# Altium PCB BSPD_SMD.PcbDoc
Units mil, origin at the board's own origin, x right, y up, seen from the top; angles counter-clockwise.
Board outline 1915 x 1430 mil, 2 copper layers (Top Layer, Bottom Layer); 23 components, 23 nets, 115 pads, 20 vias.
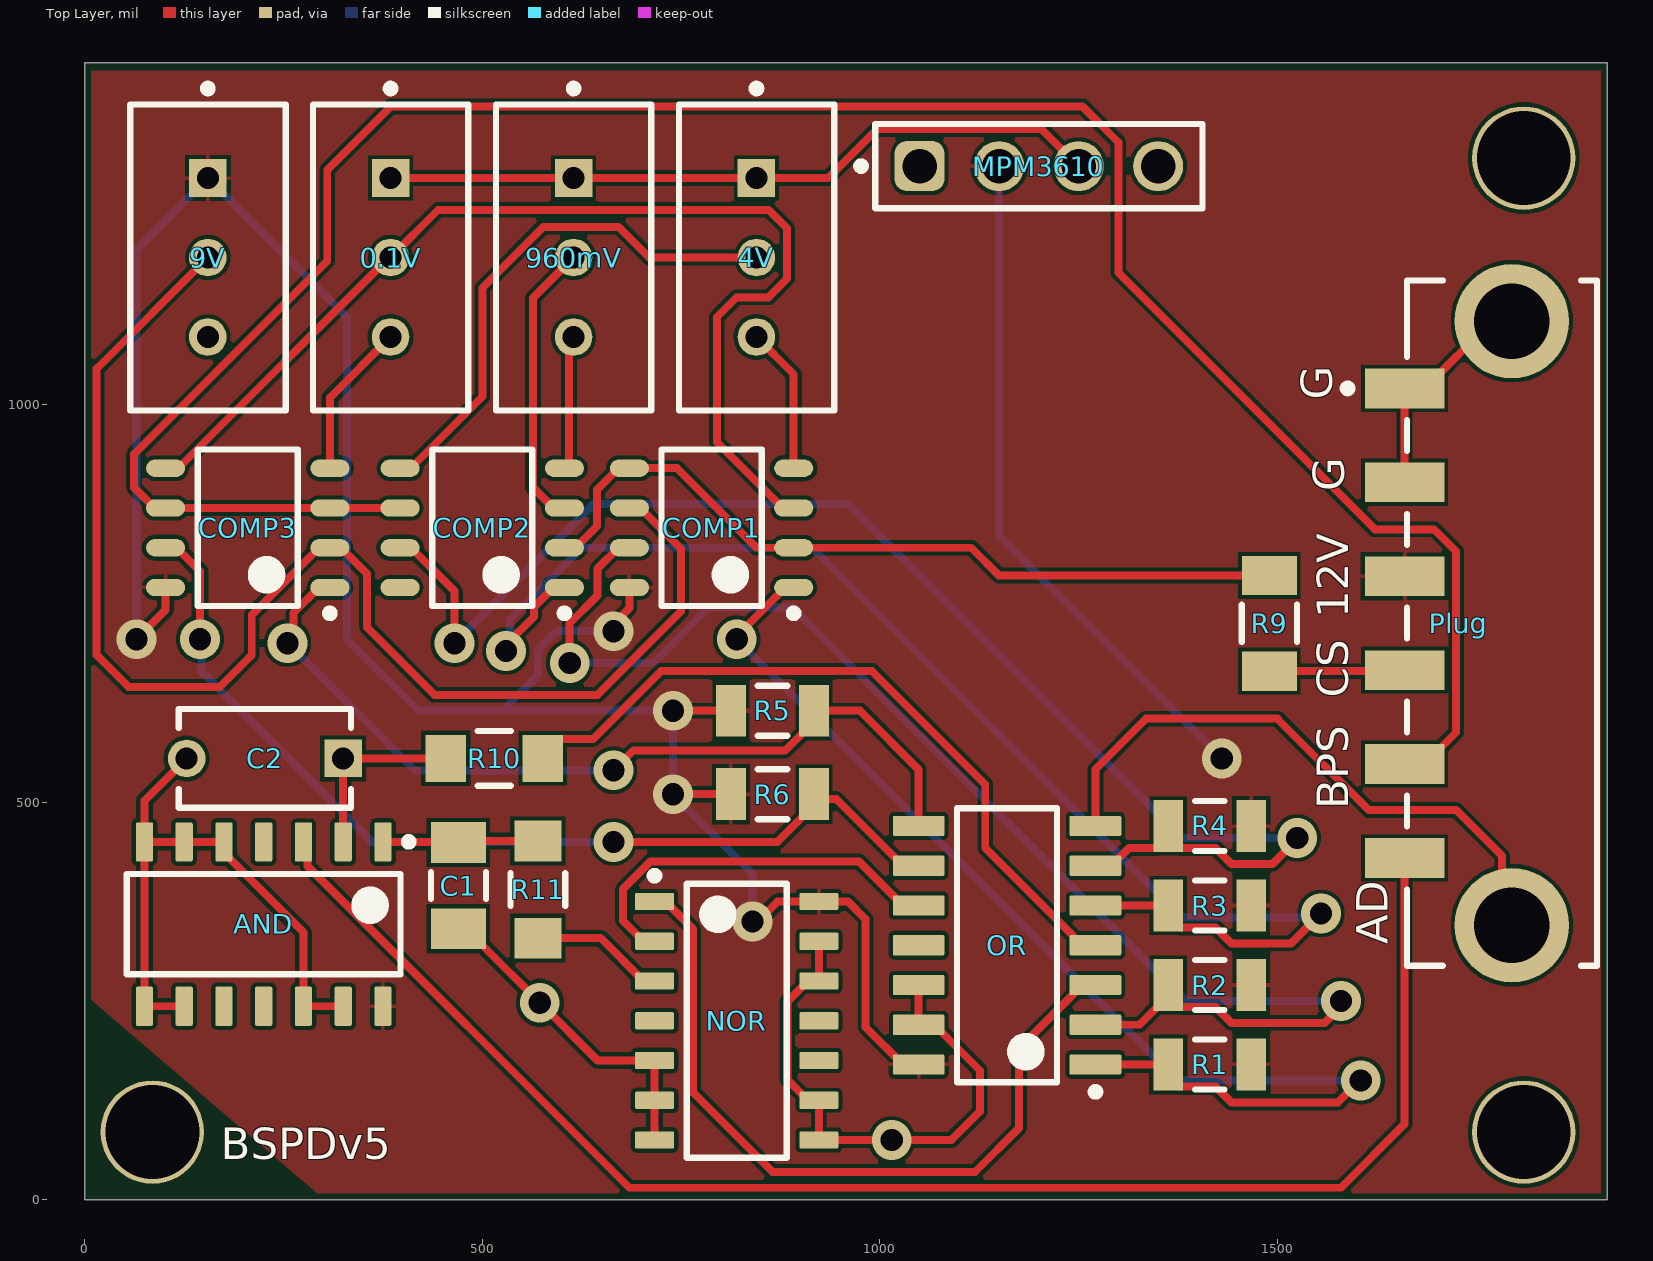
[diagram p0: Top Layer view]
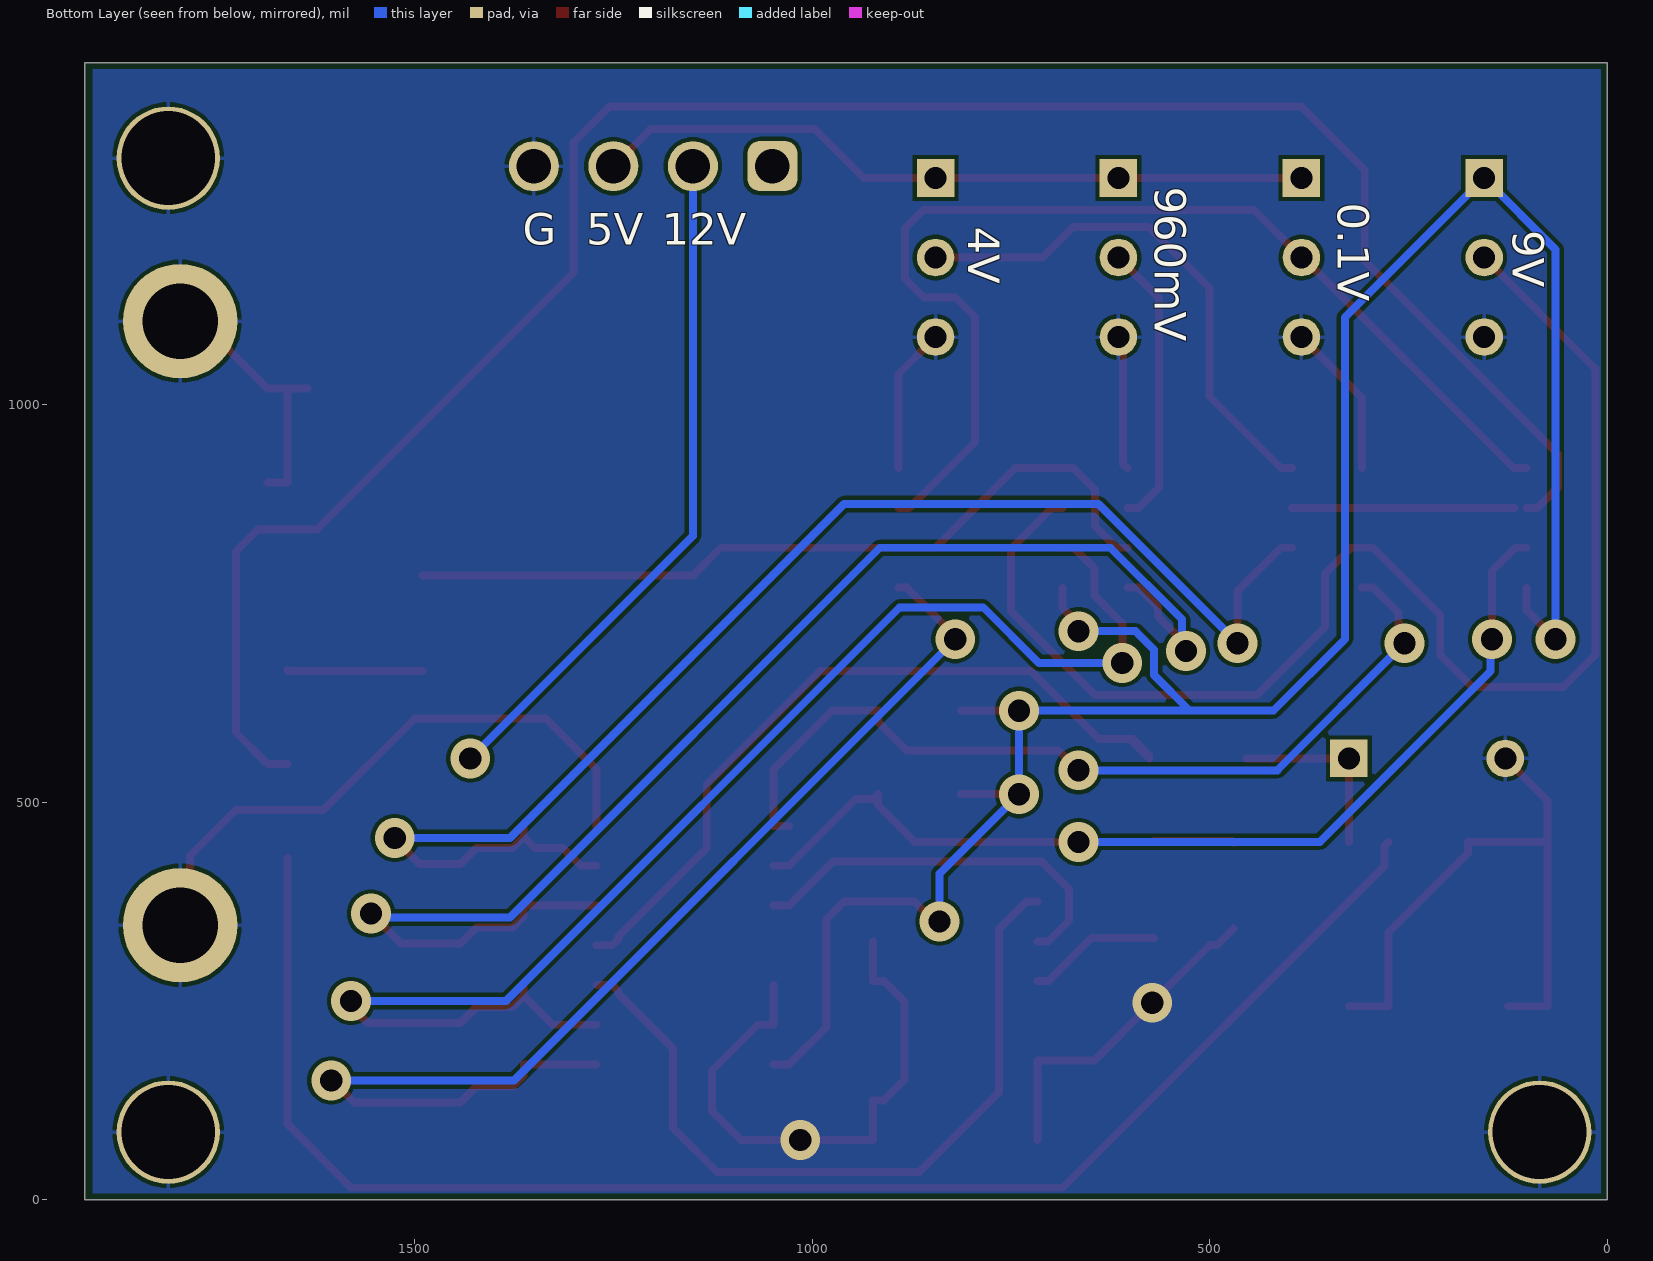
[diagram p1: Bottom Layer view, seen from below]
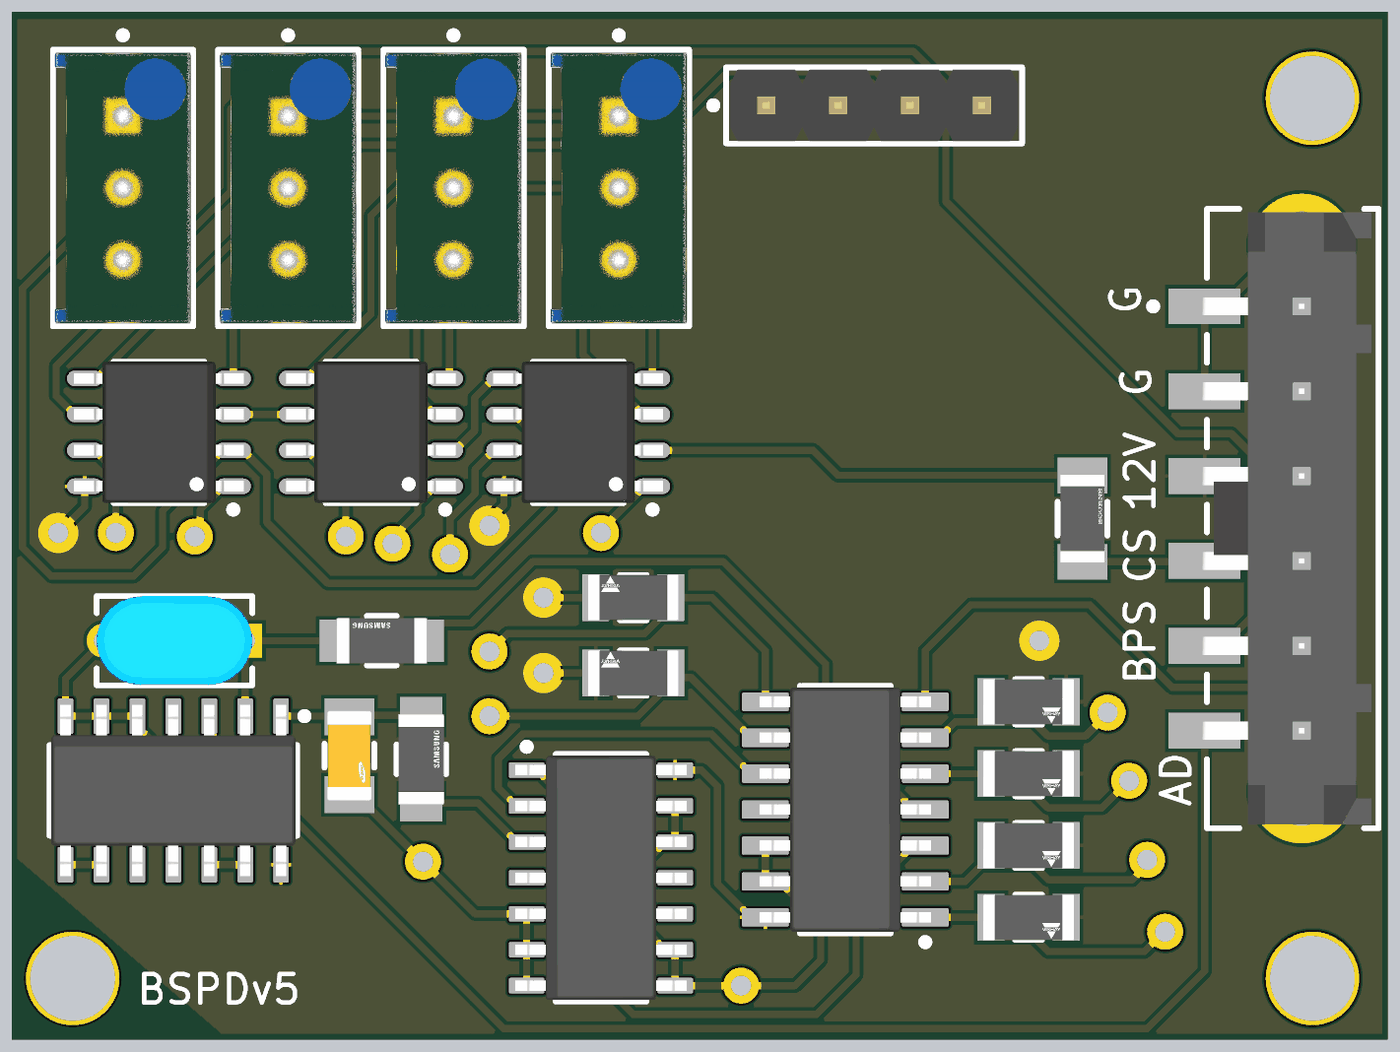
[diagram p2: 3D render of the assembled board from above, using the file's embedded part models]

## Layer stack, top to bottom
Top Solder: solder mask 0.4, Solder Resist, Dk 3.5
Top Layer: signal copper 1.4
Dielectric 1: dielectric 12.6, FR-4, Dk 4.8
Bottom Layer: signal copper 1.4
Bottom Solder: solder mask 0.4, Solder Resist, Dk 3.5

## Board outline
0,0 1915,0 1915,1430 0,1430

## Design rules (kind name [scope] priority, off if disabled: settings)
BoardOutlineClearance [All] p1: gap=7.87 ignorepadtopadclearanceinfootprint=FALSE
Clearance [All] p1: gap=5 ignorepadtopadclearanceinfootprint=FALSE except(9.84: Arc-Hole Track-Hole SMDPad-Hole THPad-Hole Via-Hole Fill-Hole Poly-Hole Region-Hole Text-Hole)
ComponentClearance [All] p1: gap=5 collisioncheckmode=3 verticalgap=5 showdistances=TRUE
DiffPairsRouting [All] p1: maxlimit=10 minlimit=5 mostfreqgap=5 toplayer_minwidth=5 toplayer_maxwidth=1000 toplayer_prefwidth=5 bottomlayer_minwidth=5 bottomlayer_maxwidth=1000 bottomlayer_prefwidth=5 maxuncoupledlength=500
Height [All] p1: minheight=0 maxheight=71497.94 prefheight=500
HoleSize [All] p1: absolutevalues=TRUE maxlimit=248.03 minlimit=11.81 maxpercent=80.000 minpercent=20.000
HoleToHoleClearance [All] p1: gap=9.84 allowstackedmicrovias=FALSE
MinimumAnnularRing [All] p1: minimumring=3
MinimumSolderMaskSliver [All] p1: minsoldermaskwidth=0
PlaneClearance [All] p1: clearance=5
PlaneConnect PlaneConnectPowerPads [InPadClass('PowerPads')] p1: planeconnectstyle=Direct reliefexpansion=20 reliefentries=4 reliefconductorwidth=10 reliefairgap=10
PlaneConnect [All] p2: pad.planeconnectstyle=Relief pad.reliefexpansion=11.81 pad.reliefentries=4 pad.reliefconductorwidth=5 pad.reliefairgap=5 via.planeconnectstyle=Direct via.reliefexpansion=11.81 via.reliefentries=4 via.reliefconductorwidth=5 via.reliefairgap=5
PolygonConnect PolygonConnectPowerPads [All vs (InPadClass('PowerPads'))] p1: connectstyle=Direct reliefconductorwidth=10 reliefentries=4 polygonreliefangle="90 Angle" airgapwidth=10
PolygonConnect [All] p2: thpad.connectstyle=Relief thpad.reliefconductorwidth=5 thpad.reliefentries=4 thpad.polygonreliefangle="90 Angle" thpad.airgapwidth=5 smdpad.connectstyle=Relief smdpad.reliefconductorwidth=5 smdpad.reliefentries=4 smdpad.polygonreliefangle="90 Angle" smdpad.airgapwidth=5 via.connectstyle=Direct via.reliefconductorwidth=5 via.reliefentries=4 via.polygonreliefangle="90 Angle" via.airgapwidth=5
RoutingVias [All] p1: holewidth=11.81 width=23.62 viastyle="Through Hole" minholewidth=11.81 minwidth=23.62 maxholewidth=23.62 maxwidth=259.84
SilkToSilkClearance [All] p1: silktosilkclearance=0
SilkToSolderMaskClearance [IsPad] p1: minsilkscreentomaskgap=5 clearancetoexposedcopper=TRUE
SolderMaskExpansion [All] p1: expansion=2.95 istentingtop=FALSE
Width [All] p1: maxlimit=1000 minlimit=5 preferedwidth=5 minimp=50.000000 maximp=50.000000 favimp=50.000000
20 further rules are at their usual default settings.

## Components (designator, comment, footprint, x,y, rotation, side; value= is the part's Value field where it differs from the comment)
0.1V "3296W-1-103LF" FP-3296W-MFG 384.84,1184.99 r180 top
4V "3296W-1-103LF" FP-3296W-MFG 845.04,1184.99 r180 top
9V "3296W-1-103LF" FP-3296W-MFG 155.04,1184.99 r180 top
960mV "3296W-1-103LF" FP-3296W-MFG 615.04,1184.99 r180 top
AND "CD4081BM" D0014A_L 225.04,346.64 r270 top
C1 "CL31B104KBP5PNE" FP-CL31-IPC_B 470.04,394.99 r270 top
C2 "RDER71H105K2M1H03A" FP-RDE2M1-MFG 226.61,554.99 r180 top
COMP1 "LM393DT" STM-SO-8_D_L 788.39,844.99 r180 top
COMP2 "LM393DT" STM-SO-8_D_L 500.04,844.99 r180 top
COMP3 "LM393DT" STM-SO-8_D_L 205.04,844.99 r180 top
MPM3610 "61300411121" 61300411121 1200.04,1299.99 r0 top
NOR "CD4001BM96" D0014A_L 820.04,224.99 r0 top
OR "CD4071BM96" D0014A_M 1160.04,319.99 r180 top
Plug "43650-0621" FP-43650-0621-MFG 1782.64,725.07 r90 top
R1 "CRCW120610K0FKEA" FP-CRCW1206-e3-IPC_C 1415.04,169.99 r0 top
R2 "CRCW120610K0FKEA" FP-CRCW1206-e3-IPC_C 1415.04,269.99 r0 top
R3 "CRCW120610K0FKEA" FP-CRCW1206-e3-IPC_C 1415.04,369.99 r0 top
R4 "CRCW120610K0FKEA" FP-CRCW1206-e3-IPC_C 1415.04,469.99 r0 top
R5 "CRCW120610K0FKEA" FP-CRCW1206-e3-IPC_C 865.04,614.99 r180 top
R6 "CRCW120610K0FKEA" FP-CRCW1206-e3-IPC_C 865.04,509.99 r180 top
R9 "CR1206-FX-1000GLF" FP-CR1206-IPC_A 1490,724.88 r90 top
R10 "RC3216J102CS" FP-RC3216-MFG 515.04,554.99 r180 top
R11 "RC3216J102CS" FP-RC3216-MFG 570.04,389.99 r90 top

## Footprints (in the part's own frame and the unit in brackets; to place one, negate y for a bottom-side part, rotate by r counter-clockwise, add the part's x,y. Pads: shape width x height; smd on the part's side, far side on the other; paste and mask are expansions set on the pad)
61300411121 [mm] "Pin Header, pitch 2.54 mm, THT, Vertical, single row, 4p"
  rrect50% 1.6x1.6 hole 1.1: 1(-3.81,0)
  round 1.6 hole 1.1: 2(-1.27,0) 3(1.27,0) 4(3.81,0)
  silkscreen extent -5.8,-1.35 5.23,1.35, body extent -5.08,-1.27 5.08,1.27, height 8.57
D0014A_L [mm] "SOIC, 14-Leads, Body 8.75x4mm, Pitch 1.27mm, IPC High Density"
  rrect18% 1.25x0.55 smd: 1(-2.625,3.81) 2(-2.625,2.54) 3(-2.625,1.27) 4(-2.625,0) 5(-2.625,-1.27) 6(-2.625,-2.54) 7(-2.625,-3.81) 8(2.625,-3.81) 9(2.625,-2.54) 10(2.625,-1.27) 11(2.625,0) 12(2.625,1.27) 13(2.625,2.54) 14(2.625,3.81)
  silkscreen extent -2.75,-4.38 1.6,4.76, body extent -3.02,-4.32 3.02,4.32, height 1.59
D0014A_M [mm] "SOIC, 14-Leads, Body 8.75x4mm, Pitch 1.27mm, IPC Low Density"
  rrect15% 1.65x0.65 smd: 1(-2.825,3.81) 2(-2.825,2.54) 3(-2.825,1.27) 4(-2.825,0) 5(-2.825,-1.27) 6(-2.825,-2.54) 7(-2.825,-3.81) 8(2.825,-3.81) 9(2.825,-2.54) 10(2.825,-1.27) 11(2.825,0) 12(2.825,1.27) 13(2.825,2.54) 14(2.825,3.81)
  silkscreen extent -2.95,-4.38 1.6,4.81, body extent -3.02,-4.32 3.02,4.32, height 1.59
FP-3296W-MFG [mm]
  rect 1.2x1.2 hole 0.7 paste-2539.97 mask+0: 1(0.005,-2.54)
  round 1.2 hole 0.7 paste-2539.97 mask+0: 2(0.005,0) 3(0.005,2.54)
  silkscreen extent -2.48,-5.52 2.48,4.89, body extent -2.58,-4.99 2.58,4.99, height 0.25
FP-43650-0621-MFG [mm]
  rect 1.27x2.54 smd paste+0 mask+0: 1(7.5,3.115) 2(4.5,3.115) 3(1.5,3.115) 4(-1.5,3.115) 5(-4.5,3.115) 6(-7.5,3.115)
  round 3.66 hole 2.41 paste-2539.97 mask+0: 7(-9.65,-0.315) 8(9.65,-0.315)
  silkscreen extent -10.94,-3.04 10.94,5.06, body extent -11.58,-3.14 11.58,4.48, height 0.25
FP-CL31-IPC_B [mil]
  rect 51.4x69.22 smd paste+0 mask+0: 1(-54.19,0) 2(54.19,0)
  silkscreen extent -17,-35 17,35, body extent -90,-44 90,44, height 10
FP-CR1206-IPC_A [mil]
  rect 49.53x69.38 smd paste+0 mask+0: 1(-60.12,0) 2(60.12,0)
  silkscreen extent -24,-35 24,35, body extent -105,-54 105,54, height 10
FP-CRCW1206-e3-IPC_C [mil]
  rect 37.64x65.28 smd paste+0 mask+0: 1(-52.21,0) 2(52.21,0)
  silkscreen extent -19,-31 19,31, body extent -75,-38 75,38, height 10
FP-RC3216-MFG [mm]
  rect 1.3x1.5 smd paste+0 mask+0: 1(-1.55,0) 2(1.55,0)
  silkscreen extent -0.53,-0.87 0.53,0.87, body extent -2.3,-0.97 2.3,0.97, height 0.25
FP-RDE2M1-MFG [mm]
  rect 1.2x1.2 hole 0.7 paste-2539.97 mask+0: 1(-2.5,0)
  round 1.2 hole 0.7 paste-2539.97 mask+0: 2(2.5,0)
  silkscreen extent -2.75,-1.58 2.75,1.58, body extent -3.2,-1.68 3.2,1.68, height 0.25
STM-SO-8_D_L [mm] "SOIC, 8-Leads, Body 5x4mm, Pitch 1.27mm, IPC High Density"
  oval 1.25x0.55 smd: 1(-2.625,1.905) 2(-2.625,0.635) 3(-2.625,-0.635) 4(-2.625,-1.905) 5(2.625,-1.905) 6(2.625,-0.635) 7(2.625,0.635) 8(2.625,1.905)
  silkscreen extent -2.75,-2.5 1.6,2.85, body extent -3,-2.5 3,2.5, height 1.75

## Part data
0.1V 4V 9V 960mV: library part CMP-1747-00001-8, "TRIMMER 10K OHM 0.5W PC PIN TOP", Color=Blue, Insulation Resistance=1GR, Max Operating Temperature=125°C, Max Power Dissipation=500mW, Min Operating Temperature=-55°C, Package Quantity=50, Resistance=10kR, Resistance Tolerance=10%, Resistor Type=Cermet, Temperature Coefficient=100ppm/°C, Contact Plating=Tin, Depth=4.83mm, Height=11.55mm, Lead Free="Lead Free", Length=9.53mm, Military Standard=Not, Mount="Through Hole", Number of Turns=25, Packaging=Rail/Tube, Power Rating=500mW, Radiation Hardening=No, Reach SVHC Compliant=Yes, RoHS Compliant=Yes, Series=3296, Taper=Linear, Technology=CERMET, Termination=Pin, Tolerance=10%, Weight=0.03oz, Width=9.53mm
AND: library part CMP-0777-00097-3, "CMOS Quad 2-Input AND Gate, D0014A, TUBE", F @ Nom Voltage(Max)(Mhz)=8, Generic Part Number=CD4081B, ICC @ Nom Voltage(Max)(mA)=0.015, Manufacturer="Texas Instruments", Operating Temperature Range(C)="-55 to 125", Rating=Military, tpd @ Nom Voltage(Max)(ns)=12, Voltage(Nom)(V)=10, Bits(#)=4, DatasheetVersion=SCHS057C, Input Type=CMOS, Output Drive (IOL/IOH)(Max)(mA)=-6.8/6.8, Output Type=CMOS, PackageReference=D0014A, Schmitt Trigger=No, Technology Family=CD4000, VCC(Max)(V)=18, VCC(Min)(V)=3
C1: library part CMP-13271-003837-1, "Cap Ceramic 100nF 50V X7R ±10% SMD 1206 +125°C Embossed T/R", Capacitance=100nF, Case Code (Imperial)=1206, Case Code (Metric)=3216, Max Operating Temperature=125°C, Min Operating Temperature=-55°C, Package Quantity=2000, Ratings=AEC-Q200, Tolerance=10%, Voltage Rating=50V, Case/Package=1206, Features="Soft Termination", Length=0.126inch, Mount="Surface Mount", Packaging="Tape and Reel", Thickness=0.051inch, Width=0.063inch
C2: library part CMP-06035-045612-1, "Ceramic Capacitor 1uF ±10% 50V X7R Radial", Capacitance=1uF, Case/Package=Radial, Dielectric=X7R, Max Operating Temperature=125°C, Min Operating Temperature=-55°C, Package Quantity=2000, Resistor Type=Ceramic, Tolerance=10%, Voltage Rating=50V, Height=4mm, Height - Seated (Max)=0.236inch, Lead Diameter=0.5mm, Lead Free="Lead Free", Lead Pitch=0.197inch, Lead/Base Style=Kinked, Length=0.217inch, Mount="Through Hole", Packaging="Tape and Reel", Termination=Radial, Voltage Rating (DC)=50V, Width=4mm
COMP1 COMP2 COMP3: library part CMP-2000-06550-1, "Low-Power, Dual-Voltage Comparator, 2 to 36 V, 0 to 70 degC, 8-Pin SOIC (SO), RoHS, Tape and Reel", Current - Input Bias (Max)=0.25µA@5V, Current - Output (Typ)=18mA@5V, Current - Quiescent (Max)=2.5mA, Manufacturer=STMicroelectronics, Operating Temperature=0°C~70°C, Package / Case="8-SOIC(0.154\",3.90mmWidth)", Package Description="8-Pin Small Outline Integrated Circuit, Body 4.9 x 3.9 mm, Pitch 1.27 mm", Package Reference=SO-8, Standard Package=2,500, Supplier Device Package=8-SO, Voltage - Input Offset (Max)=5mV@30V, Voltage - Supply, Single/Dual (±)=2V~36V,±1V~18V, Category=IntegratedCircuits(ICs), Datasheet URL=http://www.st.com/content/ccc/resource/technical/document/datasheet/group1/b4/cc/cf/13/18/28/44/f5/CD00000465/files/CD00000465.pdf/jcr:content/translations/en.CD00000465.pdf, Datasheet Version="Rev. 15, 02/2016", EDA / CAD Models=DownloadfromAcceleratedDesigns, Family=Linear-Comparators, Manufacturer URL=http://www.st.com/, Mounting Technology=SurfaceMount, Mounting Type=SurfaceMount, Number of Elements=2, Online Catalog=Comparators-2elements, Other Names=497-1593-2, Other Related Documents=LM393ViewAllSpecificationsLM393ViewAllSpecifications, Output Type=CMOS,DTL,ECL,MOS,Open-Collector,TTL, Packaging=Tape&Reel(TR), Type=GeneralPurpose
MPM3610: library part CMP-1502-01064-3, Color=Black, Contact Resistance=20mΩ, Current Rating=3A, Max Operating Temperature=105°C, Min Operating Temperature=-40°C, Operating Supply Voltage=250V, Connector Type="Male Pin", Contact Material=Copper, Contact Mating Length=5.9944mm, Contact Plating=Gold, Gender=Male, Height=8.89mm, Lead Free="Lead Free", Lead Pitch=2.54mm, Mount="Through Hole", NexarPartId=32855522, Number of Contacts=4, Number of Pins=4, Number of Positions=4, Number of Rows=1, Orientation=Vertical, Packaging=Bulk, Pitch=2.54mm, REACH SVHC=Unknown, RoHS=Compliant, Termination=Solder, Voltage Rating=250V
NOR: library part CMP-0806-00070-3, "CMOS Quad 2-Input NOR Gate, D0014A, LARGE T&R", F @ Nom Voltage(Max)(Mhz)=8, Generic Part Number=CD4001B, ICC @ Nom Voltage(Max)(mA)=0.015, Manufacturer="Texas Instruments", Operating Temperature Range(C)="-55 to 125", Rating=Military, tpd @ Nom Voltage(Max)(ns)=120, Voltage(Nom)(V)=10, Bits(#)=4, Code_JEDEC=MS-012, DatasheetVersion=SCHS015C, Input Type=CMOS, Output Drive (IOL/IOH)(Max)(mA)=1.5/-1.5, Output Type=CMOS, PackageReference=D0014A, PackageVersion=http://www.ti.com/lit/ml/mpds177g/mpds177g.pdf, VCC(Max)(V)=18, VCC(Min)(V)=3
OR: library part CMP-1573-00001-3, "CMOS Quad 2-Input OR Gate, D0014A, LARGE T&R", F @ Nom Voltage(Max)(Mhz)=8, Generic Part Number=CD4071B, ICC @ Nom Voltage(Max)(mA)=0.015, Manufacturer="Texas Instruments", Operating Temperature Range(C)="-55 to 125", Rating=Military, tpd @ Nom Voltage(Max)(ns)=120, Voltage(Nom)(V)=10, Bits(#)=4, Code_JEDEC=MS-012, DatasheetVersion=SCHS056D, Input Type=CMOS, Output Drive (IOL/IOH)(Max)(mA)=1.5/-1.5, Output Type=CMOS, PackageReference=D0014A, PackageVersion=http://www.ti.com/lit/ml/mpds177g/mpds177g.pdf, VCC(Max)(V)=18, VCC(Min)(V)=3
Plug: library part CMP-00257-07662232-1, "43650-0621 Header 3.00mm, SMT, single row, vert, 6w", Current Rating=5A, Manufacturer Lifecycle Status=ACTIVE, Max Operating Temperature=105°C, Min Operating Temperature=-40°C, Voltage Rating=600V, Contact Gender=Male, Contact Material=Brass, Contact Plating=Tin, Country of Origin=US, Gender=Male, Glow Wire Compliant=Compliant, Halogen Free="Low Halogen", Housing Material=Polymer, Lifecycle Status=Production, Mount="Surface Mount", NexarPartId=7662232, Number of Circuits=6, Number of Contacts=6, Number of Pins=6, Number of Positions=6, Number of Rows=1, Orientation=Vertical, Pitch=3mm, Plating=Tin, RoHS=Compliant, Termination=Solder
R1 R2 R3 R4 R5 R6: library part CMP-2003-04807-2, "RES Thick Film, 10kΩ, 1%, 0.25W, 100ppm/°C, 1206", Case Code (Imperial)=1206, Case Code (Metric)=3216, Max Operating Temperature=155°C, Max Power Dissipation=250mW, Min Operating Temperature=-55°C, Package Quantity=10, Resistance=10kR, Temperature Coefficient=100ppm/°C, Tolerance=1%, Voltage Rating=200V, Case/Package=1206, Composition="Thick Film", Contact Plating=Tin, Depth=1.6mm, Features="Automotive AEC-Q200", Height=0.55mm, Lead Free="Lead Free", Length=3.2mm, Military Standard=Not, Number of Pins=2, Number of Terminations=2, Packaging="Tape and Reel", Power Rating=250mW, Radiation Hardening=No, Termination=SMD/SMT, Voltage Rating (DC)=200V, Weight=0.000353oz, Width=0.063inch, Working Voltage=200V
R9: library part CMP-07231-000980-1, "Thick Film Chip Resistors 1206 100Ω 0.25W 1% 100ppm/°C", Case Code (Imperial)=1206, Case Code (Metric)=3216, Max Operating Temperature=155°C, Max Power Dissipation=250mW, Min Operating Temperature=-55°C, Package Quantity=1, Resistance=100R, Temperature Coefficient=100ppm/°C, Tolerance=1%, Voltage Rating=200V, Case/Package=1206, Composition="Thick Film", Contact Plating=Tin, Depth=1.6mm, Features="Moisture Resistant", Height=0.03inch, Height - Seated (Max)=0.03inch, Length=0.126inch, Military Standard=Not, Mount="Surface Mount", Number of Terminations=2, Packaging="Tape and Reel", Power Rating=250mW, Radiation Hardening=No, Termination=SMD/SMT, Thickness=610um, Width=0.063inch
R10 R11: library part CMP-13261-001932-1, "Res Thick Film 1206 1kΩ 5% 0.25W ±100ppm/°C Molded SMD T/R", Case Code (Imperial)=1206, Case Code (Metric)=3216, Max Operating Temperature=155°C, Max Power Dissipation=250mW, Min Operating Temperature=-55°C, Resistance=1kR, Temperature Coefficient=100ppm/°C, Tolerance=5%, Voltage Rating (DC)=200V, Case/Package=1206, Composition="Thick Film", Contact Plating=Tin, Depth=1.6mm, Features="Moisture Resistant", Height=0.026inch, Lead Free="Lead Free", Length=0.126inch, Military Standard=Not, Number of Terminations=2, Packaging="Tape and Reel", Power Rating=250mW, Radiation Hardening=No, Width=0.063inch

## Free pads (board coordinates)
  round 130 hole 118.11: 4(85,85) 4(1810,85) 4(1810,1310)

## Via types
v1: diameter 50, hole 28, Top Layer to Bottom Layer, 20 vias

## Nets (pads, with @x,y where several pads share a name; then routed paths per layer and width w, separated by ;. In a path a pad name is that pad's centre, name@x,y a point inside that pad or via, vN(x,y) a via of type N, cw(c..) or ccw(c..) an arc to the next point about the centre after c; other vN are vias at no path point)
0.1V: 0.1V.2 COMP1.3 COMP3.5 | length 1385.9
  Top Layer w10: COMP3.5 117.56,919.99 382.56,1184.99 0.1V.2 444.65,1244.99 860.01,1244.99 883.46,1221.54 883.46,1158.46 860,1135 820,1135 795,1110 795,952.94 877.95,869.99 COMP1.3
4V: 4V.2 COMP2.5 | length 670
  Top Layer w10: COMP2.5 410.04,919.99 500.04,1009.99 500.04,1146.71 576.95,1223.61 671.39,1223.61 710.01,1184.99 4V.2
5V: 0.1V.1 4V.1 960mV.1 MPM3610.3 | length 910.1
  Top Layer w10: 0.1V.1 960mV.1 4V.1 935.06,1284.99 996.55,1346.49 1203.54,1346.49 MPM3610.3
9V: 9V.2 COMP1.6 COMP3.2 | length 1735.9
  Top Layer w10: 9V.2 15,1045.15 15,685 55,645 170,645 210.04,685.04 210.04,735.42 294.61,819.99 COMP3.2 322.17,819.99 355.04,787.12 355.04,719.99 440.03,635 645,635 750,740 750,818.81 698.82,869.99 COMP1.6
12V: 9V.1 AND.14 COMP1.8 COMP3.8 MPM3610.2 NOR.14 OR.14 Plug.3 R1.2 R2.2 R3.2 R4.2 R5.2 R6.2 | length 3771.5
  Top Layer w10: v1(65,705) 101.69,741.69 COMP3.8 ; v1(665,715) 665,724.12 685.04,744.16 COMP1.8 ; v1(740,510) R6.2 ; v1(740,615) R5.2 ; v1(840,350) 846.59,350 871.58,374.99 NOR.14 960.01,374.99 982.17,352.83 982.17,216.96 1029.13,169.99 OR.14 ; MPM3610.2@1150.04,1324.99 MPM3610.2@1160.18,1314.85
  Bottom Layer w10: v1(65,705) 65,1195.15 9V.1 330,1109.83 330,705 420,615 525,615 ; v1(665,715) 593.43,715 570,691.57 570,660 525,615 ; v1(840,350) 840,410 v1(740,510) v1(740,615) 525,615 ; MPM3610.2 1150.04,834.96 v1(1430,555)
960mV: 960mV.2 COMP2.3 | length 360.6
  Top Layer w10: COMP2.3 589.61,869.99 563.78,895.82 563.78,1133.93 960mV.2
"Accumulator Disconnect": AND.3 Plug.6 | length 1947.7
  Top Layer w10: AND.3 280.28,444.75 280.28,419.72 685,15 1580,15 1660,95 Plug.6
"Brake Pressure Sensor": COMP2.6 COMP3.3 COMP3.6 Plug.5 | length 2920.1
  Top Layer w10: COMP3.6 87.91,869.99 62.09,895.82 62.09,937.61 305,1180.53 305,1295 384.99,1374.99 1255.01,1374.99 1300,1330 1300,1166.02 1622.84,843.18 1697.16,843.18 1725,815.34 1725,587.9 1685,547.9 Plug.5 ; COMP3.6@116.69,869.99 COMP3.3 COMP2.6
CMP1A_OUT: COMP1.1 OR.1 R1.1 | length 1488.8
  Top Layer w10: v1(820.04,704.99) 820.04,708.92 881.11,769.99 COMP1.1 ; OR.1 R1.1 1362.83,156.17 1376.65,142.35 1422.21,142.35 1442.21,122.35 1576.08,122.35 1603.74,150 v1(1605,150)
  Bottom Layer w10: v1(820.04,704.99) 1375.03,150 v1(1605,150)
CMP1B_OUT: COMP1.7 OR.2 R2.1 | length 1755.3
  Top Layer w10: v1(610,675) 610,725 645.04,760.04 645.04,793.77 671.26,819.99 COMP1.7 ; OR.2 1326.65,219.99 R2.1@1362.83,256.17 ; R2.1 R2.1@1362.83,256.17 ; v1(1580,250) 1580,242.98 1559.37,222.35 1442.21,222.35 1422.21,242.35 1376.65,242.35 R2.1@1362.83,256.17
  Bottom Layer w10: v1(610,675) 715,675 785,745 890.03,745 1385.03,250 v1(1580,250)
CMP2A_OUT: COMP2.1 OR.5 R3.1 | length 1739.6
  Top Layer w10: v1(530,690) 530,698.25 565,733.25 565,745.38 589.61,769.99 COMP2.1 ; OR.5 R3.1 1362.83,356.17 1376.65,342.35 1422.21,342.35 1442.21,322.35 1517.35,322.35 v1(1555,360)
  Bottom Layer w10: v1(530,690) 535,695 535,730 624.99,819.99 915.04,819.99 1380.03,355 1550,355 v1(1555,360)
CMP2B_OUT: COMP2.7 OR.6 R4.1 | length 1773.9
  Top Layer w10: COMP2.7 410.47,819.99 465.04,765.42 v1(465.04,699.99) ; OR.6 1290.94,419.99 1313.3,442.35 1349.01,442.35 R4.1@1362.83,456.17 ; R4.1 R4.1@1362.83,456.17 ; v1(1525,455) 1525,453.34 1494.01,422.35 1442.21,422.35 1422.21,442.35 1376.65,442.35 R4.1@1362.83,456.17
  Bottom Layer w10: v1(465.04,699.99) 640.04,874.99 960.04,874.99 1380.03,455 v1(1525,455)
CMP3A_OUT: COMP3.1 OR.8 R5.1 | length 1131.9
  Top Layer w10: v1(255.04,699.99) 262.69,707.64 262.69,738.08 294.61,769.99 COMP3.1 COMP3.1@297.32,769.99 ; v1(665,540) 689.99,564.99 881.07,564.99 917.25,601.17 R5.1 975.01,614.99 1048.82,541.18 OR.8 OR.8@1029.13,469.99
  Bottom Layer w10: v1(255.04,699.99) 415.03,540 v1(665,540)
CMP3B_OUT: COMP3.7 OR.9 R6.1 | length 1243.2
  Top Layer w10: COMP3.7 115.47,819.99 145.04,790.42 v1(145.04,704.99) ; v1(665,450) 871.08,450 903.43,482.35 917.25,496.17 R6.1 923.32,503.91 945.21,503.91 1029.13,419.99 OR.9
  Bottom Layer w10: v1(145.04,704.99) 146.58,703.45 146.58,664.99 361.57,450 v1(665,450)
"Current Sensor": Plug.4 R9.1 | length 170.5
  Top Layer w10: R9.1 1658.78,664.79 Plug.4
"Current Sensor_V": COMP1.2 COMP1.5 COMP2.2 R9.2 | length 1010.8
  Top Layer w10: COMP2.2 617.17,819.99 644.21,847.04 644.21,892.94 671.26,919.99 COMP1.5 745.04,919.99 845.04,819.99 COMP1.2 1115.01,819.99 1149.88,785.12 R9.2@1490,785.12
GND: 0.1V.3 4V.3 9V.3 960mV.3 AND.5 AND.6 AND.7 AND.8 AND.9 AND.12 AND.13 C1.2 C2.2 COMP1.4 COMP2.4 COMP3.4 MPM3610.4 NOR.5 NOR.6 NOR.7 NOR.8 NOR.9 NOR.12 NOR.13 OR.7 OR.12 OR.13 pad.4 Plug.1 Plug.2 Plug.7 Plug.8 | length 3578.1
  Top Layer w10: AND.9 AND.8 AND.7 ; C2.2 75.04,501.84 AND.7 ; COMP3.4 308.39,1008.73 0.1V.3 ; AND.13 AND.12 275.04,336.21 175.04,436.21 AND.5 AND.6 AND.7 ; C1.2 490.74,320.1 499.9,320.1 v1(572.45,247.55) 645.01,174.99 NOR.5 NOR.6 NOR.7 ; COMP2.4 603.73,919.99 609.11,925.37 609.11,1079.26 960mV.3 ; 4V.3 891.73,1038.1 COMP1.4 ; NOR.13 NOR.12 909.61,274.99 883.78,249.16 883.78,150.82 909.61,124.99 NOR.9 NOR.8 1089.99,74.99 1125.86,110.86 1125.86,162.64 1068.5,219.99 OR.13 OR.12 ; OR.7 1271.26,541.26 1335,605 1500,605 1615,490 1725,490 1782.81,432.19 1782.81,357.38 Plug.7 ; Plug.1@1635,1020.34 Plug.1 ; Plug.2@1685,902.23 Plug.2 Plug.1 ; Plug.8 1769.65,1104.99 1685,1020.34 Plug.1
  other v1: 1015,75
NORA_OUT: NOR.3 R11.1 | length 170.5
  Top Layer w10: R11.1@571.06,329.99 R11.1 648.94,328.97 702.91,274.99 NOR.3
ORA_OUT: NOR.1 OR.3 | length 973.7
  Top Layer w10: NOR.1 730.47,374.99 765,340.46 765,135 865,35 1120,35 1175,90 1175,190 1243.78,258.78 1243.78,262.19 1251.57,269.99 OR.3
ORB_OUT: OR.4 R10.1 | length 964
  Top Layer w10: R10.1@596.65,575.58 R10.1 576.06,558.93 596.65,579.52 639.52,579.52 724.99,664.99 990.01,664.99 1132.66,522.34 1132.66,442.34 1243.78,331.22 1243.78,327.79 1251.57,319.99 OR.4
ORC_OUT: NOR.2 OR.10 | length 499.4
  Top Layer w10: NOR.2 702.91,324.99 677.09,350.82 677.09,390.89 711.64,425.44 973.68,425.44 1029.13,369.99 OR.10
R10_OUT: AND.2 C2.1 R10.2 | length 234
  Top Layer w10: AND.2 C2.1 R10.2
R11_OUT: AND.1 C1.1 R11.2 | length 196.1
  Top Layer w10: AND.1 469.23,449.99 C1.1 471.88,451.01 R11.2
pads on no net: AND.4 AND.10 AND.11 COMP2.8 MPM3610.1 NOR.4 NOR.10 NOR.11 OR.11

## Polygon pours and split planes (outlines as drawn)
GND on Bottom Layer "NONET_L-01_P-001" (solid, pour order 3): 65,0 1905,0 1905,1425 0,1425 0,0
12V on Top Layer "NONET_L-01_P-001" (solid, pour order 5): 5,254.29 301.67,0 1910,0 1910,1420 5,1420

## Silkscreen, mask and mechanical layers (free items; w line width, h text height)
Top Overlay:
  text "G" at 1569,1006 h40 r90
  text "G" at 1584,891 h40 r90
  text "12V" at 1589,731 h40 r90
  text "CS" at 1589,631 h40 r90
  text "BPS" at 1589,491 h40 r90
  text "AD" at 1639,321 h40 r90
  text "BSPDv5" at 171,51 h40
Bottom Overlay:
  text "960mV" at 569,1274 h40 r90
  text "0.1V" at 339,1254 h40 r90
  text "4V" at 804,1224 h40 r90
  text "9V" at 119,1219 h40 r90
  text "12V" at 1189,1201 h40
  text "5V" at 1284,1201 h40
  text "G" at 1364,1201 h40